# Altium PCB pcb phong khach.PcbDoc
Units mm, origin at the board's own origin, x right, y up, seen from the top; angles counter-clockwise.
Board outline 106.3 x 78.99 mm, 2 copper layers (Top Layer, Bottom Layer); 26 components, 22 nets, 85 pads, 4 vias.
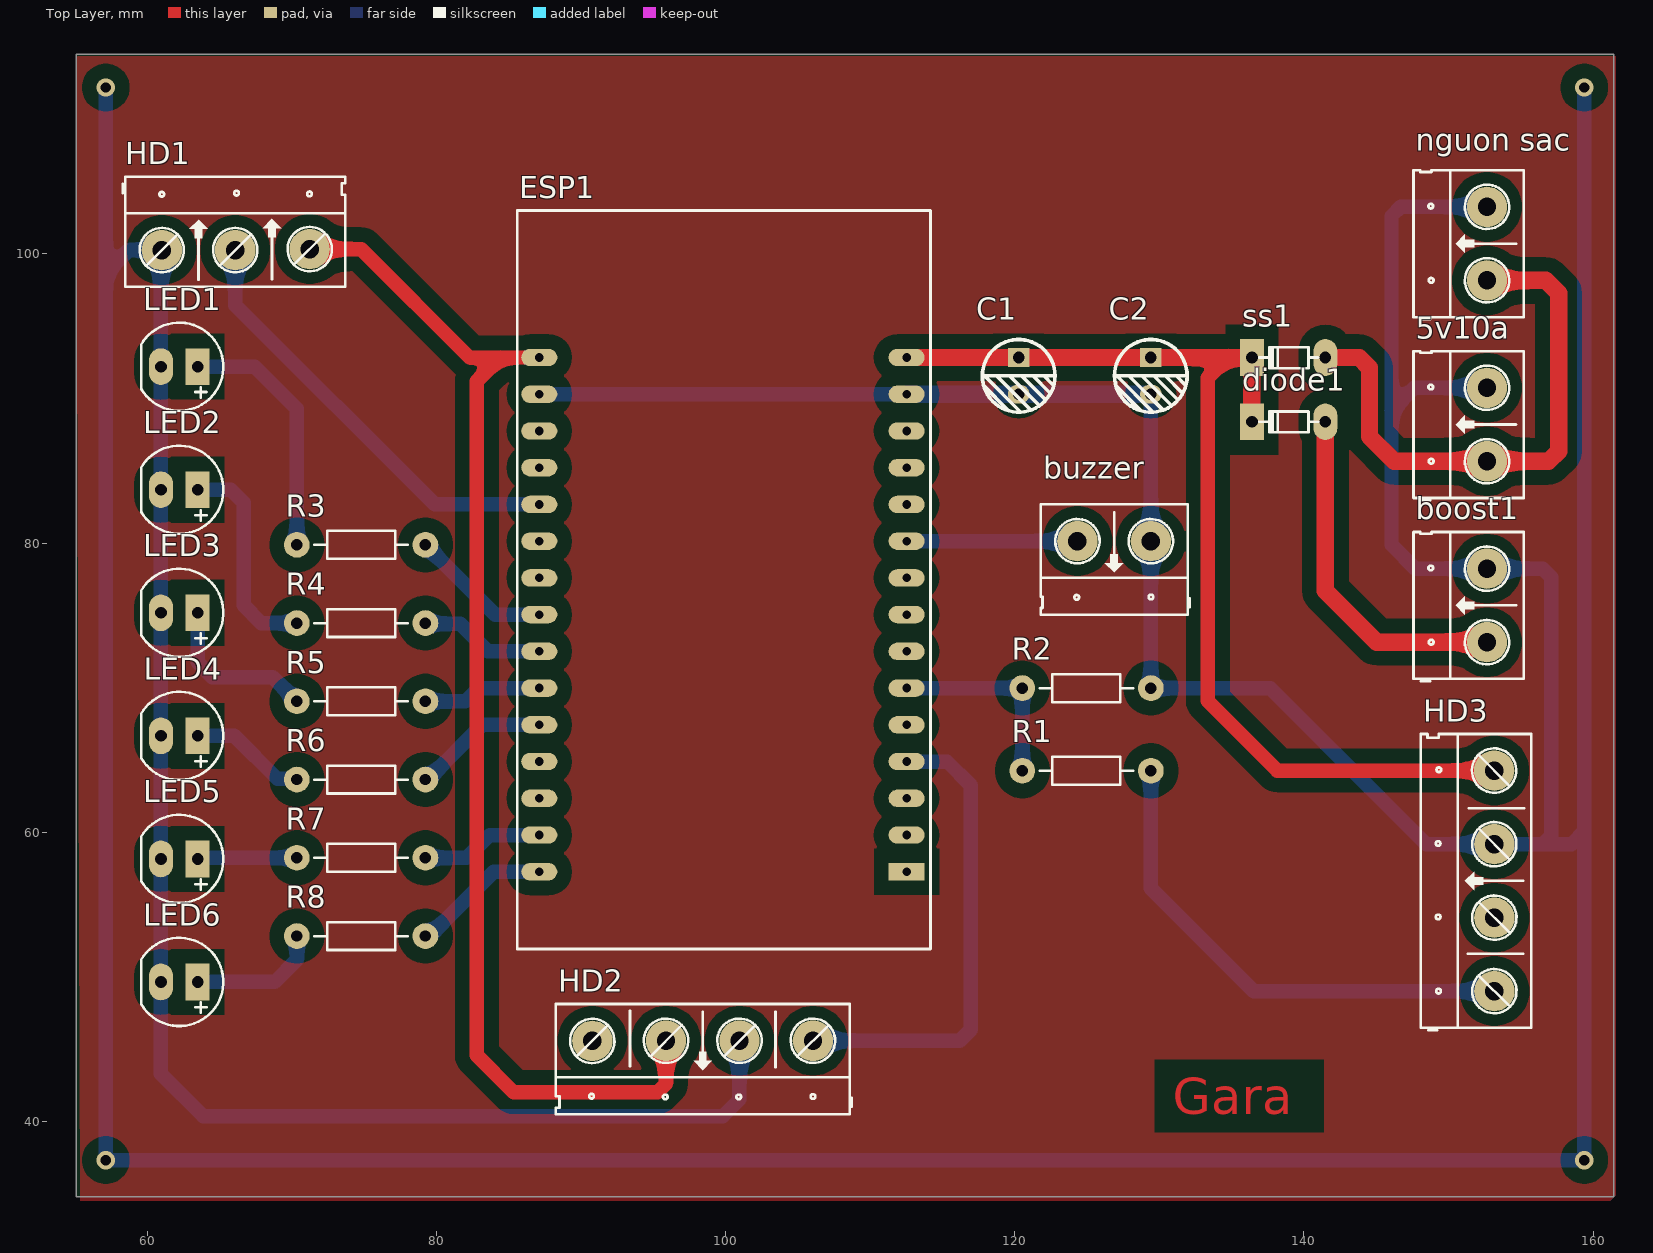
[diagram p0: Top Layer view]
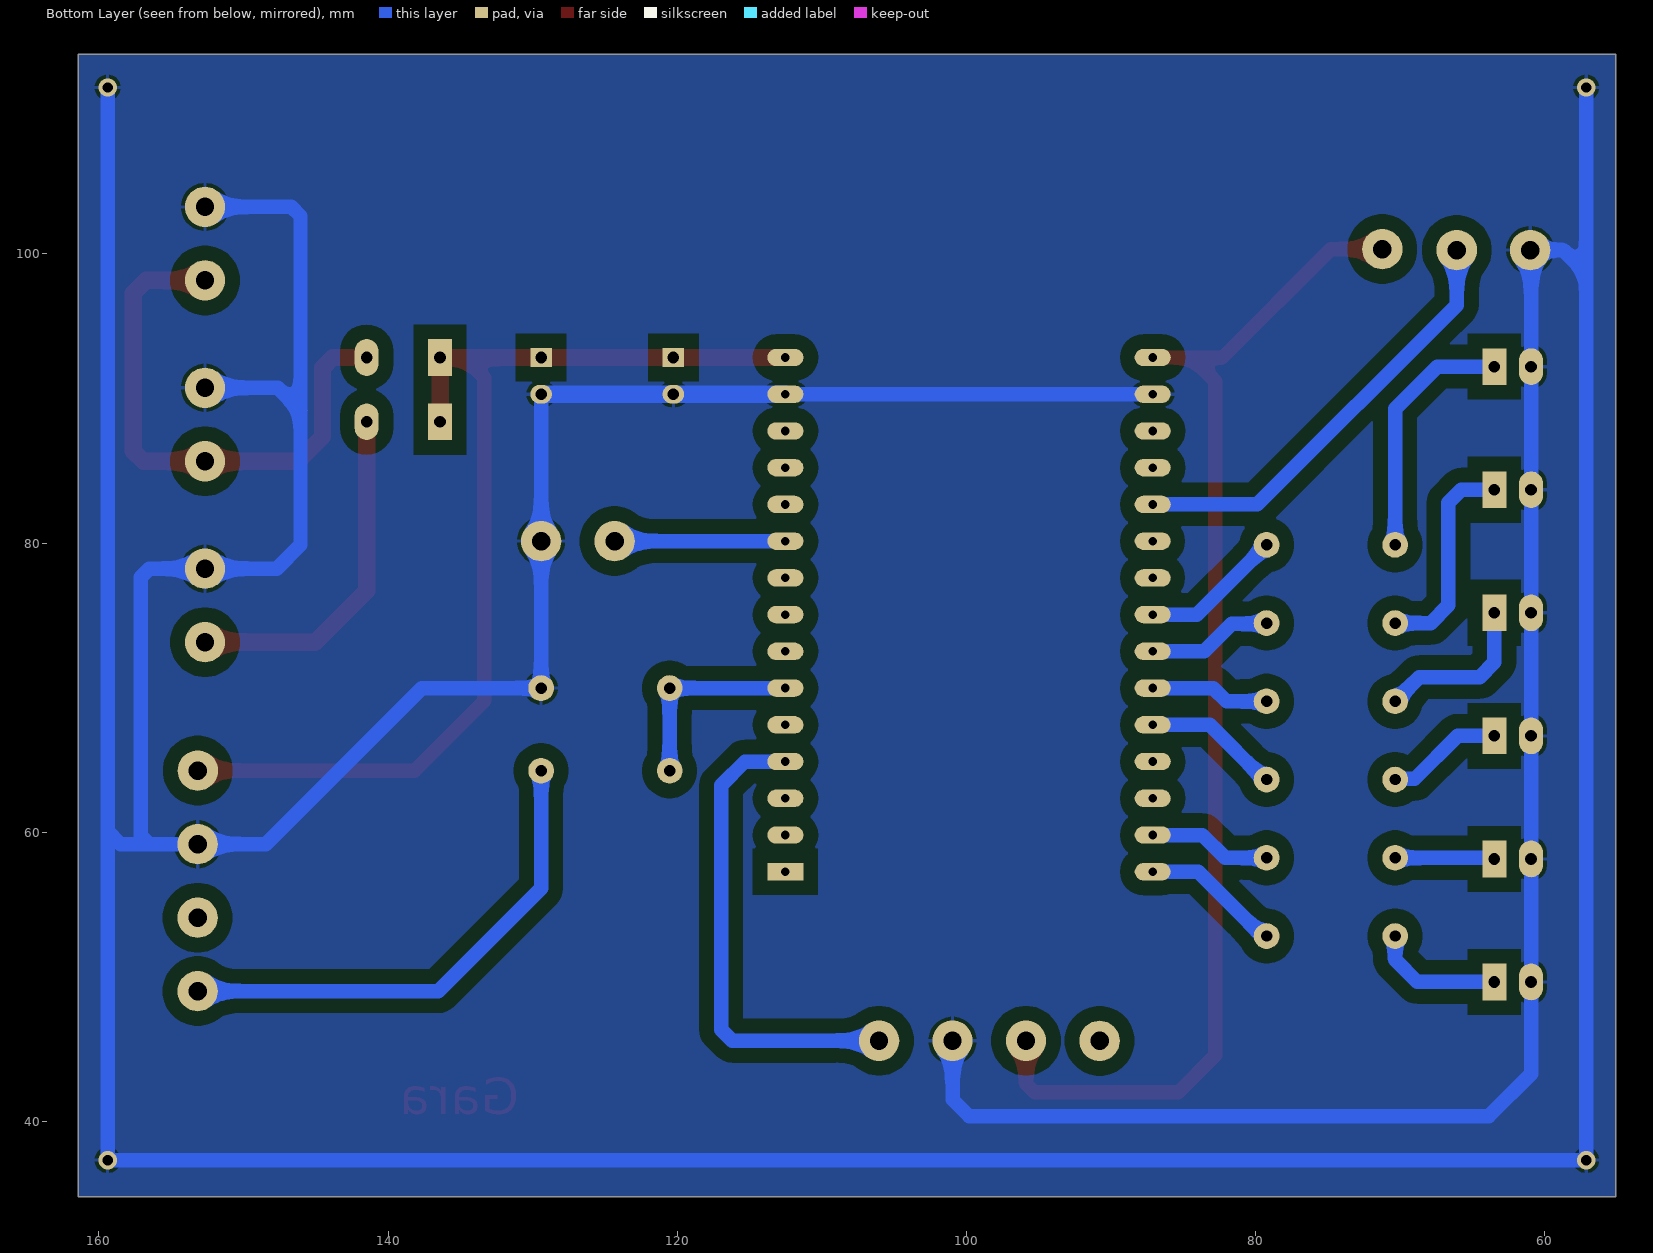
[diagram p1: Bottom Layer view, seen from below]
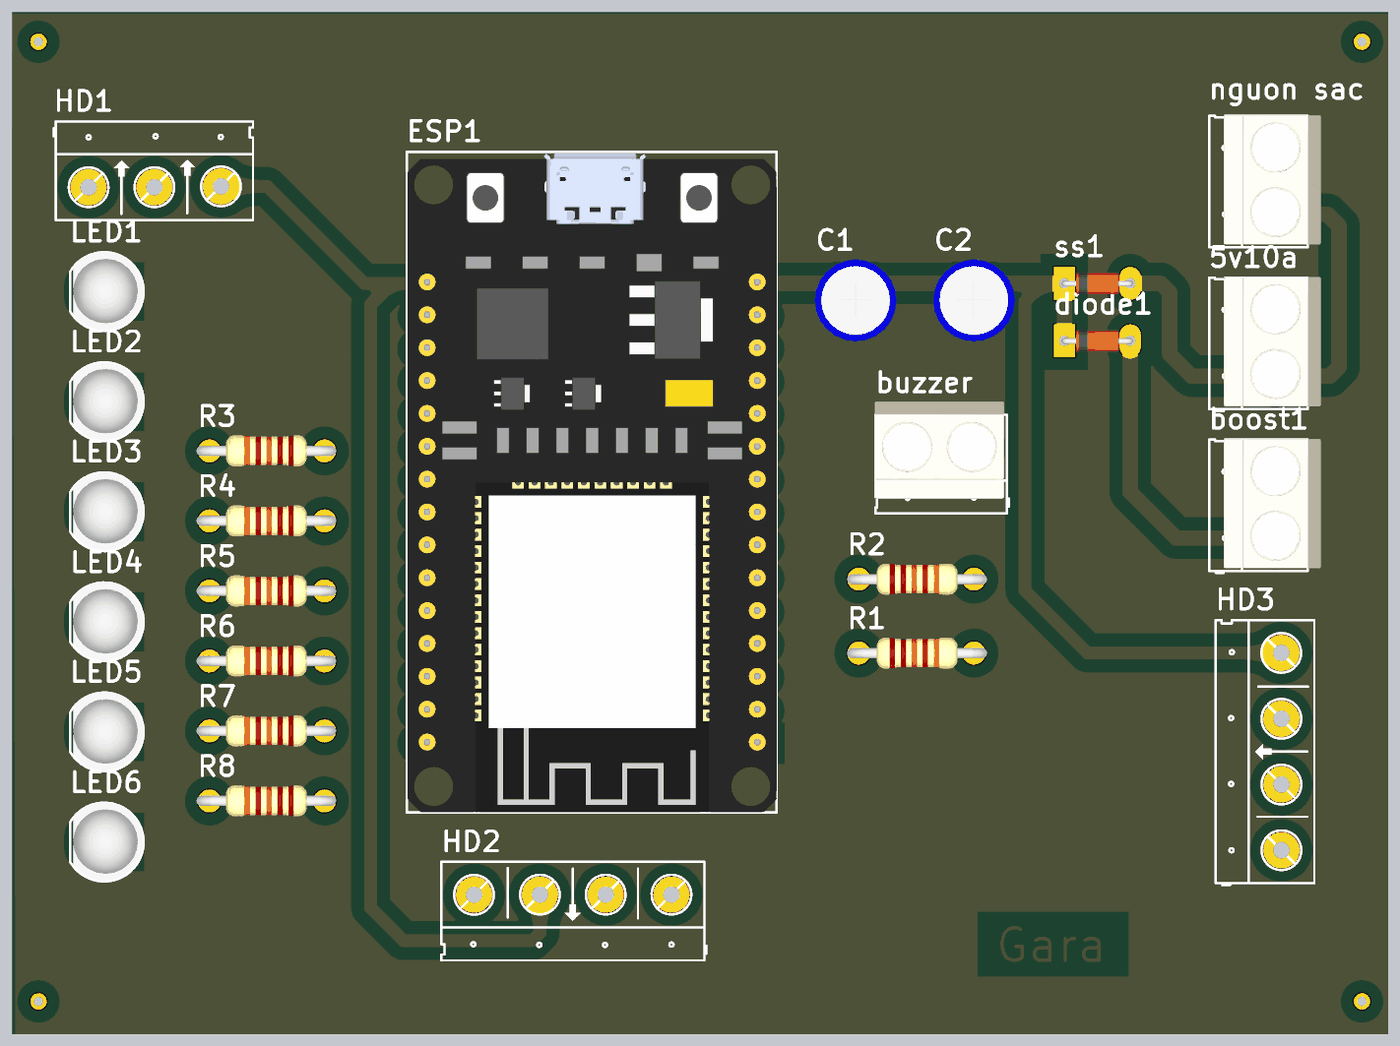
[diagram p2: 3D render of the assembled board from above, using the file's embedded part models]

## Layer stack, top to bottom
Top Solder: solder mask 0.0102, Solder Resist, Dk 3.5
Top Layer: signal copper 0.0356
Dielectric 1: dielectric 0.32, FR-4, Dk 4.8
Bottom Layer: signal copper 0.0356
Bottom Solder: solder mask 0.0102, Solder Resist, Dk 3.5

## Board outline
55.118,34.798 161.417,34.798 161.417,113.792 55.118,113.792

## Design rules (kind name [scope] priority, off if disabled: settings)
Clearance [All] p1: gap=1 ignorepadtopadclearanceinfootprint=FALSE
PolygonConnect [All] p1: connectstyle=Relief reliefconductorwidth=0.254 reliefentries=4 polygonreliefangle="90 Angle" airgapwidth=0.254
RoutingVias [All] p1: holewidth=0.711 width=1.27 viastyle="Through Hole" minholewidth=0.711 minwidth=1.27 maxholewidth=0.711 maxwidth=1.27
SolderMaskExpansion [All] p1: expansion=0.102 istentingtop=FALSE
Width [All] p1: maxlimit=1.2 minlimit=0.8 preferedwidth=1
30 further rules are at their usual default settings.

## Components (designator, comment, footprint, x,y, rotation, side; value= is the part's Value field where it differs from the comment)
5v10a "Header 2_1" HED2 152.654,85.661 r90 top value="Header 2"
boost1 "Header 2_1" HED2 152.654,73.152 r90 top value="Header 2"
buzzer "Header 2_1" HED2 129.413,80.137 r180 top value="Header 2"
C1 "0.1uF" "tu hoa 5mm" 120.269,91.567 r270 top
C2 "47uF" "tu hoa 5mm" 129.413,91.567 r270 top
diode1 "100v" "DIODE 0.5A" 138.938,88.392 r0 top
ESP1 "ESP32 DEVKIT" "ESP32 WROOM 32 KIT" 112.522,57.277 r180 top
HD1 "DHT BEP" HED3 61.02,100.263 r0 top value="Header 3"
HD2 "FLAMESENSOR" HED4 106.045,45.593 r180 top value="Header 4"
HD3 "KHOI" HED4 153.162,49.022 r90 top value="Header 4"
LED1 "LED" LED-5-Green 63.5,92.202 r180 top value="LED 3 ly Single Colour"
LED2 "LED" LED-5-Green 63.5,83.693 r180 top value="LED 3 ly Single Colour"
LED3 "LED" LED-5-Green 63.5,75.184 r180 top value="LED 3 ly Single Colour"
LED4 "LED" LED-5-Green 63.5,66.675 r180 top value="LED 3 ly Single Colour"
LED5 "LED" LED-5-Green 63.5,58.166 r180 top value="LED 3 ly Single Colour"
LED6 "LED" LED-5-Green 63.5,49.657 r180 top value="LED 3 ly Single Colour"
"nguon sac" "Header 2_1" HED2 152.654,98.171 r90 top value="Header 2"
R1 "10k" R1/4W 129.413,64.262 r180 top value="R1/4W - 1K"
R2 "20k" R1/4W 129.412,69.977 r180 top value="R1/4W - 1K"
R3 "330" R1/4W 70.358,79.883 r0 top value="R1/4W - 1K"
R4 "330" R1/4W 70.358,74.473 r0 top value="R1/4W - 1K"
R5 "330" R1/4W 70.358,69.063 r0 top value="R1/4W - 1K"
R6 "330" R1/4W 70.358,63.652 r0 top value="R1/4W - 1K"
R7 "330" R1/4W 70.358,58.242 r0 top value="R1/4W - 1K"
R8 "330" R1/4W 70.358,52.832 r0 top value="R1/4W - 1K"
ss1 "100v" "DIODE 0.5A" 138.938,92.837 r0 top

## Footprints (in the part's own frame and the unit in brackets; to place one, negate y for a bottom-side part, rotate by r counter-clockwise, add the part's x,y. Pads: shape width x height; smd on the part's side, far side on the other; paste and mask are expansions set on the pad)
"DIODE 0.5A" [mil] "Diode muoi, xung"
  oval 65x100 hole 32: 1(100,0)
  rect 65x100 hole 32: 2(-100,0)
  silkscreen extent -80,-30 80,28, body extent -108,-33 108,32, height 61
"ESP32 WROOM 32 KIT" [mm]
  rect 2.5x1.2 hole 0.6: 1(0,0)
  oval 2.5x1.2 hole 0.6: 2(0,-2.54) 3(0,-5.08) 4(0,-7.62) 5(0,-10.16) 6(0,-12.7) 7(0,-15.24) 8(0,-17.78) 9(0,-20.32) 10(0,-22.86) 11(0,-25.4) 12(0,-27.94) 13(0,-30.48) 14(0,-33.02) 15(0,-35.56) 16(25.4,-35.56) 17(25.4,-33.02) 18(25.4,-30.48) 19(25.4,-27.94) 20(25.4,-25.4) 21(25.4,-22.86) 22(25.4,-20.32) 23(25.4,-17.78) 24(25.4,-15.24) 25(25.4,-12.7) 26(25.4,-10.16) 27(25.4,-7.62) 28(25.4,-5.08) 29(25.4,-2.54) 30(25.4,0)
  silkscreen extent -1.65,-45.72 26.92,5.33, body extent -1.65,-45.6 26.85,5.33, height 10.49
HED2 [mil] "Header 2, 2 pin, hight 300mil, Pin to Pin 200, Colour Green"
  round 110 hole 50: 1(0,0) 2(200,0)
  silkscreen extent -106,-100 300,200, body extent -92,-140 302,155, height 394
HED3 [mil] "Header 3, 3 pin, hight 300mil, Pin to Pin 200, Colour Green"
  round 110 hole 50: 1(0,0) 2(200,0) 3(402.62,2.62)
  silkscreen extent -106,-100 500,200
HED4 [mil] "Header 4, 4 pin, hight 300mil, Pin to Pin 200, Colour Green"
  round 110 hole 50: 1(0,0) 2(200,0) 3(400.06,0.06) 4(600.39,0.39)
  silkscreen extent -106,-100 700,200
LED-5-Green [mil] "LED 2 PIN, 5 ly , Only colour,pin to pin 100mil"
  rect 65x100 hole 32: 1(0,0)
  oval 65x100 hole 32: 2(100,0)
  silkscreen extent -70,-120 154,120, body extent -69,-120 145,117, height 339
R1/4W [mil] "R 1/4W, 2 Pin, 350mil"
  round 70 hole 31: 1(0,0) 2(350,0)
  silkscreen extent 48,-38 302,38, body extent -40,-47 386,47, height 111
"tu hoa 5mm" [mm]
  rect 1.3x1.5 hole 0.8: 1(-1.27,0)
  oval 1.3x1.5 hole 0.8: 2(1.27,0)
  silkscreen extent -2.51,-2.51 2.51,2.51, body extent -3.12,-3.18 3.23,3.18, height 14.55

## Part data
5v10a boost1 buzzer "nguon sac": "Header, 2-Pin", Manufacturer="Generic Components", Class=Connector
C1: library part "Tu Hoa 0.1uF 50V 5x11", "Cắm", Chung_Loai=Cắm, Don_Vi=Con, Ma_Hang=MH006853, So_Chan=2, Ten_Linh_Kien="Tụ Hóa 0.1uF 50V"
C2: library part "Tu Hoa 47uF 16V 5x10", "Cắm", Chung_Loai=Cắm, Don_Vi=Con, Ma_Hang=MH006859, So_Chan=2, Ten_Linh_Kien="Tụ Hóa 47uF 16V"
diode1 ss1: library part "Diode 1N4148", "Cắm", Chung_Loai=Cắm, Don_Vi=Con, Ma_Hang=MH001065, Ten_Linh_Kien="Diode 1N4148 DO35 450mA 100V ( 1N4148 DIP)"
ESP1: library part "ESP32 WROOM 32 KIT"
HD1: library part Hed3, "Header 3 (Green)"
HD2 HD3: library part Hed4, "Header 4 (Green)"
LED1 LED2 LED3 LED4 LED5 LED6: "LED Single colour Green and Red"
R1 R2 R3 R4 R5 R6 R7 R8: library part R1/4W, "Resistor 1/4W"

## Via types
v1: diameter 1.27, hole 0.711, Top Layer to Bottom Layer, 4 vias

## Nets (pads, with @x,y where several pads share a name; then routed paths per layer and width w, separated by ;. In a path a pad name is that pad's centre, name@x,y a point inside that pad or via, vN(x,y) a via of type N, cw(c..) or ccw(c..) an arc to the next point about the centre after c; other vN are vias at no path point)
3v3: ESP1.16 HD1.3 HD2.3 | length 85.3
  Top Layer w1: HD1.3 74.803,100.33 82.296,92.837 84.455,92.837 ; ESP1.16 84.455,92.837 ; HD2.3 95.883,42.623 95.298,42.037 85.344,42.037 82.804,44.577 82.804,91.186 84.455,92.837
5v: C1.1 C2.1 diode1.2 ESP1.15 HD3.4 ss1.2 | length 74.4
  Top Layer w1: 134.747,92.837 133.35,91.44 133.35,69.088 138.166,64.272 HD3.4
  Top Layer w1.2: ESP1.15 C1.1 C2.1 134.747,92.837 ss1.2 diode1.2
"a0 flame": ESP1.4 HD2.1 | length 33.3
  Bottom Layer w1: HD2.1 116.205,45.593 116.967,46.355 116.967,63.246 115.316,64.897 ESP1.4
"a0 khoi": ESP1.6 R1.2 R2.2 | length 13.7
  Bottom Layer w1: ESP1.6 R2.2 120.522,64.263 R1.2
chung: 5v10a.1 "nguon sac.1" ss1.1 | length 38.4
  Top Layer w1.2: ss1.1 143.823,92.837 144.526,92.134 144.526,87.376 146.24,85.661 5v10a.1 156.904,85.661 157.607,86.364 157.607,97.282 156.718,98.171 152.654,98.171
data: ESP1.20 HD1.2 | length 30.5
  Bottom Layer w1: HD1.2 66.101,96.459 79.883,82.677 ESP1.20
gnd: 5v10a.2 "nguon sac.2" boost1.2 buzzer.1 C1.2 C2.2 ESP1.14 ESP1.17 HD1.1 HD2.2 HD3.3 LED1.2 LED2.2 LED3.2 LED4.2 LED5.2 LED6.2 R2.1 | length 522.8
  Bottom Layer w1: v1(57.15,111.506) 57.15,98.679 ; ESP1.17 ESP1.14 ; HD2.2 100.965,41.529 99.822,40.386 63.881,40.386 60.96,43.307 LED6.2 LED5.2 LED4.2 LED3.2 LED2.2 LED1.2 60.96,100.203 HD1.1 58.735,100.264 57.15,98.679 ; C2.2 buzzer.1 129.413,69.978 R2.1 137.668,69.977 148.463,59.182 153.159,59.182 HD3.3 156.513,59.184 ; 5v10a.2 147.637,90.742 146.05,89.154 ; 152.654,103.251 146.685,103.251 146.05,102.616 146.05,89.154 ; v1(159.385,111.506) 159.385,60.071 ; 57.15,98.679 v1(57.15,37.338) v1(159.385,37.338) 159.385,60.071 ; 146.05,89.154 146.05,79.883 147.701,78.232 156.513,78.232 157.099,77.646 157.099,59.769 156.513,59.184 ; 156.513,59.184 158.498,59.184 159.385,60.071
  Bottom Layer w1.2: ESP1.14 C1.2 C2.2
L1: ESP1.23 R3.2 | length 9.9
  Bottom Layer w1: R3.2 84.074,75.057 ESP1.23
L2: ESP1.24 R4.2 | length 8.7
  Bottom Layer w1: R4.2 79.299,74.422 81.661,74.422 83.566,72.517 ESP1.24
L3: ESP1.25 R5.2 | length 8.3
  Bottom Layer w1: R5.2 82.017,69.063 82.931,69.977 ESP1.25
L4: ESP1.26 R6.2 | length 9.4
  Bottom Layer w1: R6.2 79.4,63.652 83.185,67.437 ESP1.26
L5: ESP1.29 R7.2 | length 8.5
  Bottom Layer w1: R7.2 82.118,58.242 83.693,59.817 ESP1.29
L6: ESP1.30 R8.2 | length 9.7
  Bottom Layer w1: R8.2 79.459,52.832 79.848,53.221 79.925,53.221 83.981,57.277 ESP1.30
Netboost1_1: boost1.1 diode1.1 | length 24.3
  Top Layer w1.2: diode1.1 141.478,76.708 145.034,73.152 boost1.1
Netbuzzer_2: buzzer.2 ESP1.10 | length 11.8
  Bottom Layer w1: ESP1.10 buzzer.2
NetHD3_1: HD3.1 R1.1 | length 34.8
  Bottom Layer w1: R1.1 129.413,56.134 136.525,49.022 HD3.1
NetLED1_1: LED1.1 R3.1 | length 17.5
  Bottom Layer w1: LED1.1 67.437,92.202 70.358,89.281 R3.1
NetLED2_1: LED2.1 R4.1 | length 14.8
  Bottom Layer w1: LED2.1 65.786,83.693 66.675,82.804 66.675,75.692 67.894,74.473 R4.1
NetLED3_1: LED3.1 R5.1 | length 11.4
  Bottom Layer w1: LED3.1 63.5,71.755 64.516,70.739 68.682,70.739 R5.1
NetLED4_1: LED4.1 R6.1 | length 8.1
  Bottom Layer w1: LED4.1 66.04,66.675 69.021,63.694 70.316,63.694 R6.1
NetLED5_1: LED5.1 R7.1 | length 6.9
  Bottom Layer w1: LED5.1 63.576,58.242 R7.1
NetLED6_1: LED6.1 R8.1 | length 9.1
  Bottom Layer w1: LED6.1 68.834,49.657 70.358,51.181 R8.1
pads on no net: ESP1.1 ESP1.2 ESP1.3 ESP1.5 ESP1.7 ESP1.8 ESP1.9 ESP1.11 ESP1.12 ESP1.13 ESP1.18 ESP1.19 ESP1.21 ESP1.22 ESP1.27 ESP1.28 HD2.4 HD3.2

## Polygon pours and split planes (outlines as drawn)
gnd on Bottom Layer "GND_L02_P007" (solid, pour order 7): 55.118,113.792 161.417,113.792 161.417,34.798 55.118,34.798
no net on Top Layer "NONET_L01_P009" (solid, pour order 9): 55.118,113.792 55.245,113.665 161.544,113.665 161.544,34.925 161.163,34.544 55.372,34.544

## Other copper
Top Layer:
  text "Gara" at 130.937,40.513 h2.5